# Altium PCB Balanza.PcbDoc
Units mm, origin at the board's own origin, x right, y up, seen from the top; angles counter-clockwise.
Board outline 104.52 x 61.09 mm, 2 copper layers (Top Layer, Bottom Layer); 11 components, 14 nets, 75 pads, 0 vias.
Unrouted connection lines stored in the file: 1.
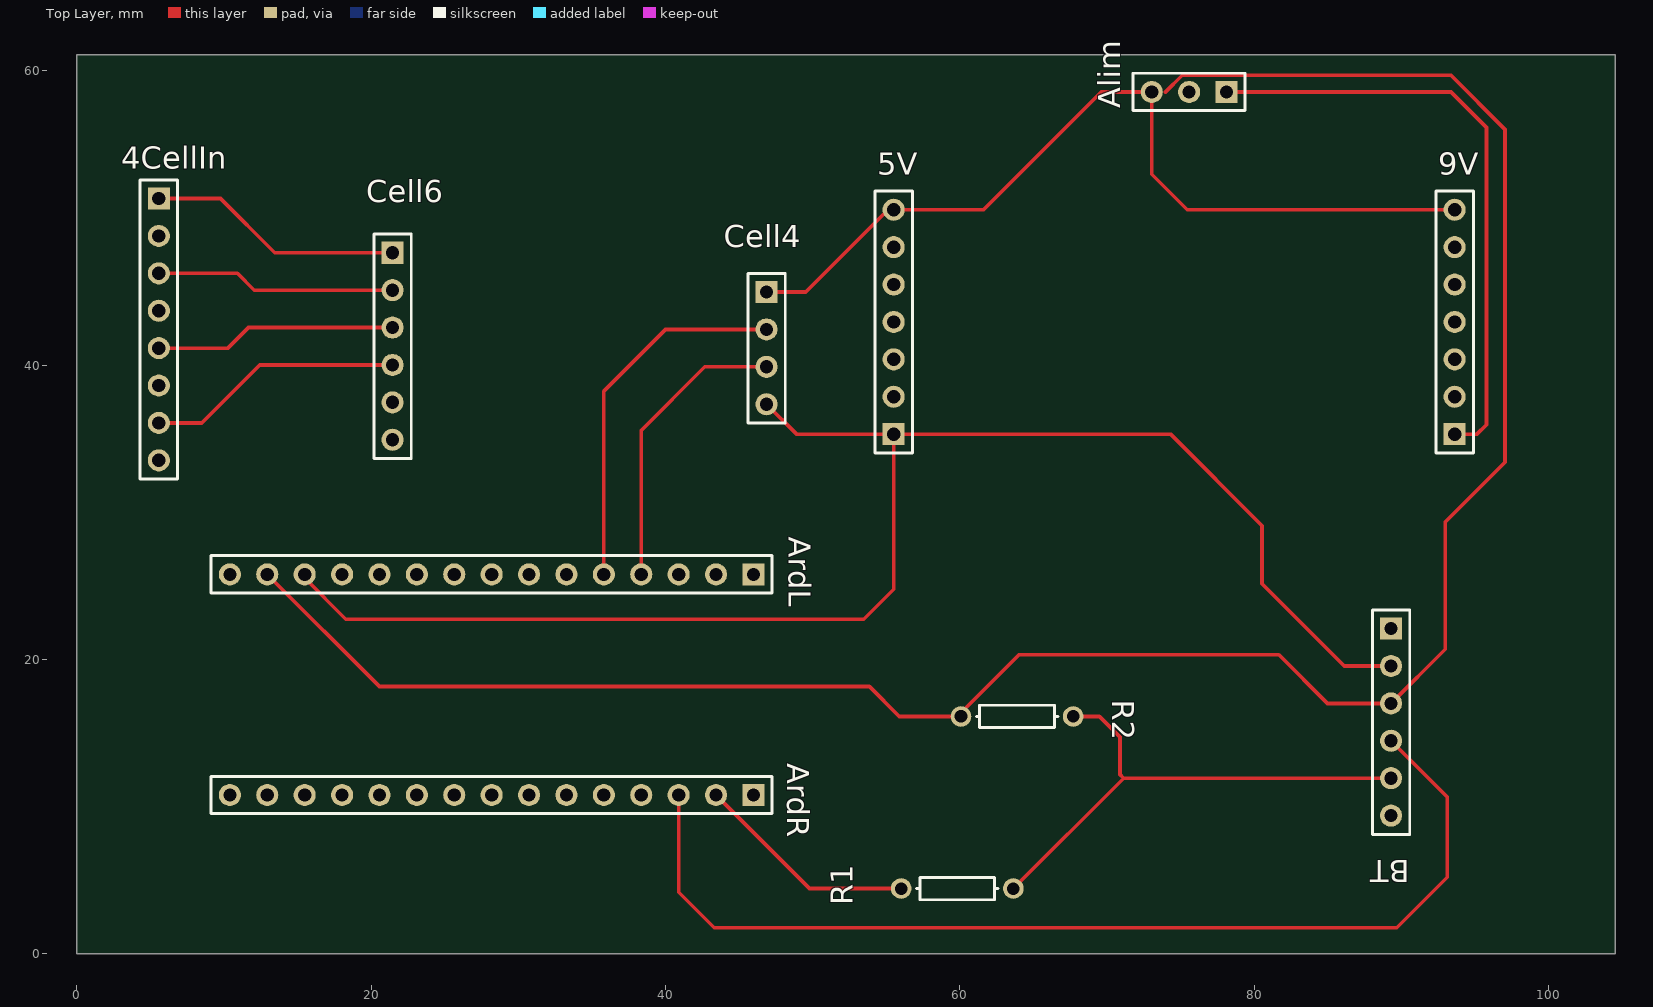
[diagram p0: Top Layer view]
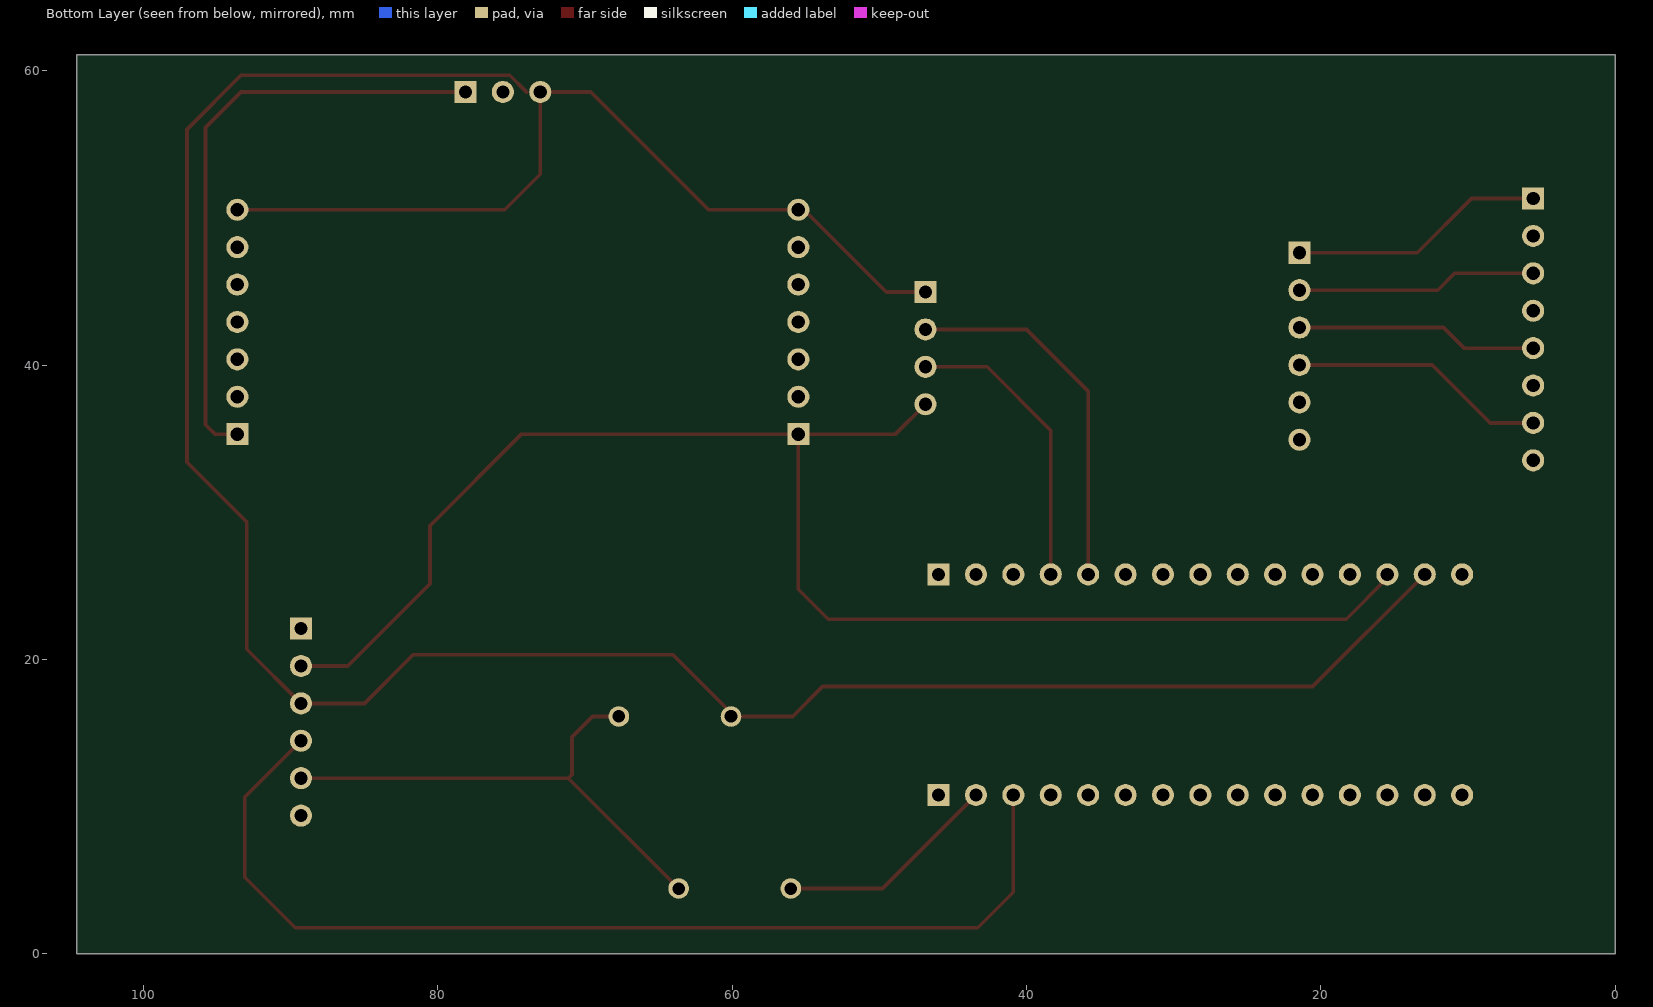
[diagram p1: Bottom Layer view, seen from below]

## Layer stack, top to bottom
Top Solder: solder mask 0.0102, Solder Resist, Dk 3.5
Top Layer: signal copper 0.0356
Dielectric 1: dielectric 0.32, FR-4, Dk 4.8
Bottom Layer: signal copper 0.0356
Bottom Solder: solder mask 0.0102, Solder Resist, Dk 3.5

## Board outline
0,0 0,61.087 104.521,61.087 104.521,0

## Design rules (kind name [scope] priority, off if disabled: settings)
Clearance [All] p1: gap=0.254
PolygonConnect [All] p1: connectstyle=Relief reliefconductorwidth=0.254 reliefentries=4 polygonreliefangle="90 Angle" airgapwidth=0.254
RoomDefinition Balanza [InComponentClass('Balanza')] p1: confinementstyle=ConfineIn formatcopy=TRUE lockcomponents=FALSE outline 0,0 104.521,0 104.521,61.087 0,61.087
RoutingVias [All] p1: holewidth=0.711 width=1.27 viastyle="Through Hole" minholewidth=0.711 minwidth=1.27 maxholewidth=0.711 maxwidth=1.27
SolderMaskExpansion [All] p1: expansion=0.102
Width [All] p1: maxlimit=0.254 minlimit=0.254 preferedwidth=0.254
30 further rules are at their usual default settings.

## Components (designator, comment, footprint, x,y, rotation, side; value= is the part's Value field where it differs from the comment)
4CellIn "Header 8" HDR1X8 5.588,51.308 r270 top
5V "Header 7" HDR1X7 55.499,35.306 r90 top
9V "Header 7" HDR1X7 93.599,35.306 r90 top
Alim "Header 3" HDR1X3 78.105,58.547 r180 top
ArdL "Header 15" HDR1X15 45.974,25.781 r180 top
ArdR "Header 15" HDR1X15 45.974,10.795 r180 top
BT "Header 6" HDR1X6 89.281,22.098 r270 top
Cell4 "Header 4" HDR1X4 46.863,44.958 r270 top
Cell6 "Header 6" HDR1X6 21.463,47.625 r270 top
R1 "Res1" AXIAL-0.3 59.817,4.445 r0 top
R2 "Res1" AXIAL-0.3 63.881,16.129 r180 top

## Footprints (in the part's own frame and the unit in brackets; to place one, negate y for a bottom-side part, rotate by r counter-clockwise, add the part's x,y. Pads: shape width x height; smd on the part's side, far side on the other; paste and mask are expansions set on the pad)
AXIAL-0.3 [mm] "Axial Device, Thru-Hole; 2 Leads; 0.3 in Pin Spacing"
  round 1.4 hole 0.85: 1(-3.81,0) 2(3.81,0)
  silkscreen extent -2.77,-0.76 2.77,0.76
HDR1X3 [mm] "Connector; Header; 3 Position"
  rect 1.5x1.5 hole 0.9: 1(0,0)
  round 1.5 hole 0.9: 2(2.54,0) 3(5.08,0)
  silkscreen extent -1.27,-1.27 6.35,1.27
HDR1X4 [mm] "Connector; Header; 4 Position"
  rect 1.5x1.5 hole 0.9: 1(0,0)
  round 1.5 hole 0.9: 2(2.54,0) 3(5.08,0) 4(7.62,0)
  silkscreen extent -1.27,-1.27 8.89,1.27
HDR1X6 [mm] "Connector; Header; 6 Position"
  rect 1.5x1.5 hole 0.9: 1(0,0)
  round 1.5 hole 0.9: 2(2.54,0) 3(5.08,0) 4(7.62,0) 5(10.16,0) 6(12.7,0)
  silkscreen extent -1.27,-1.27 13.97,1.27
HDR1X7 [mm] "Connector; Header; 7 Position"
  rect 1.5x1.5 hole 0.9: 1(0,0)
  round 1.5 hole 0.9: 2(2.54,0) 3(5.08,0) 4(7.62,0) 5(10.16,0) 6(12.7,0) 7(15.24,0)
  silkscreen extent -1.27,-1.27 16.51,1.27
HDR1X8 [mm] "Connector; Header; 8 Position"
  rect 1.5x1.5 hole 0.9: 1(0,0)
  round 1.5 hole 0.9: 2(2.54,0) 3(5.08,0) 4(7.62,0) 5(10.16,0) 6(12.7,0) 7(15.24,0) 8(17.78,0)
  silkscreen extent -1.27,-1.27 19.05,1.27
HDR1X15 [mm] "Connector; Header; 15 Position"
  rect 1.5x1.5 hole 0.9: 1(0,0)
  round 1.5 hole 0.9: 2(2.54,0) 3(5.08,0) 4(7.62,0) 5(10.16,0) 6(12.7,0) 7(15.24,0) 8(17.78,0) 9(20.32,0) 10(22.86,0) 11(25.4,0) 12(27.94,0) 13(30.48,0) 14(33.02,0) 15(35.56,0)
  silkscreen extent -1.27,-1.27 36.83,1.27

## Part data
4CellIn: "Header, 8-Pin"
5V 9V: "Header, 7-Pin"
Alim: "Header, 3-Pin"
ArdL ArdR: "Header, 15-Pin"
BT Cell6: "Header, 6-Pin"
Cell4: "Header, 4-Pin"
R1 R2: "Resistor"

## Nets (pads, with @x,y where several pads share a name; then routed paths per layer and width w, separated by ;. In a path a pad name is that pad's centre, name@x,y a point inside that pad or via, vN(x,y) a via of type N, cw(c..) or ccw(c..) an arc to the next point about the centre after c; other vN are vias at no path point)
5V: 5V.1 ArdL.13 BT.2 Cell4.4 | length 104.6
  Top Layer w0.254: ArdL.13@15.494,25.527 18.288,22.733 53.467,22.733 55.499,24.765 5V.1 ; Cell4.4 48.895,35.306 5V.1 ; BT.2 86.106,19.558 80.518,25.146 80.518,29.083 74.295,35.306 5V.1
A+: 4CellIn.7 Cell6.4 | length 17.5
  Top Layer w0.254: 4CellIn.7 8.509,36.068 12.446,40.005 Cell6.4
A-: 4CellIn.5 Cell6.3 | length 16.5
  Top Layer w0.254: 4CellIn.5 10.287,41.148 11.684,42.545 Cell6.3
B+: Cell6.6
B-: Cell6.5
D10: ArdR.3 BT.4 | length 72.1
  Top Layer w0.254: ArdR.3 40.894,4.191 43.307,1.778 89.662,1.778 93.091,5.207 93.091,10.668 BT.4
D11: ArdR.2 R1.1 | length 15.2
  Top Layer w0.254: ArdR.2 49.784,4.445 R1.1
DT: ArdL.5 Cell4.2 | length 25.2
  Top Layer w0.254: ArdL.5 35.814,38.227 40.005,42.418 Cell4.2
E+: 4CellIn.1 Cell6.1 | length 17.4
  Top Layer w0.254: 4CellIn.1 9.779,51.308 13.462,47.625 Cell6.1
E-: 4CellIn.3 Cell6.2 | length 16.3
  Top Layer w0.254: 4CellIn.3 10.922,46.228 12.065,45.085 Cell6.2
GND: 5V.7 9V.7 Alim.3 ArdL.14 BT.3 Cell4.1 R2.2 | length 209.8
  Top Layer w0.254: ArdL.14 20.574,18.161 53.848,18.161 55.88,16.129 R2.2 60.071,16.383 64.008,20.32 81.661,20.32 84.963,17.018 BT.3 92.964,20.701 92.964,29.337 97.028,33.401 97.028,56.007 93.357,59.678 75.097,59.678 73.966,58.547 ; Cell4.1 49.53,44.958 55.118,50.546 5V.7 61.595,50.546 69.596,58.547 Alim.3 73.025,52.959 75.438,50.546 9V.7
RXD: BT.5 R1.2 R2.1 | length 35.4
  Top Layer w0.254: R1.2 71.12,11.938 ; R2.1 69.469,16.129 70.866,14.732 70.866,12.192 71.12,11.938 ; BT.5 71.12,11.938
SCK: ArdL.4 Cell4.3 | length 20.1
  Top Layer w0.254: ArdL.4 38.354,35.56 42.672,39.878 Cell4.3
VCC: 9V.1 Alim.1 | length 41.3
  Top Layer w0.254: Alim.1 93.345,58.547 95.758,56.134 95.758,35.941 95.123,35.306 9V.1
pads on no net: 4CellIn.2 4CellIn.4 4CellIn.6 4CellIn.8 5V.2 5V.3 5V.4 5V.5 5V.6 9V.2 9V.3 9V.4 9V.5 9V.6 Alim.2 ArdL.1 ArdL.2 ArdL.3 ArdL.6 ArdL.7 ArdL.8 ArdL.9 ArdL.10 ArdL.11 ArdL.12 ArdL.15 ArdR.1 ArdR.4 ArdR.5 ArdR.6 ArdR.7 ArdR.8 ArdR.9 ArdR.10 ArdR.11 ArdR.12 ArdR.13 ArdR.14 ArdR.15 BT.1 BT.6